# Altium PCB power_supply_pcb.PcbDoc
Units mm, origin at the board's own origin, x right, y up, seen from the top; angles counter-clockwise.
Board outline 52 x 90 mm, 2 copper layers (Top Layer, Bottom Layer); 8 components, 6 nets, 32 pads, 0 vias.
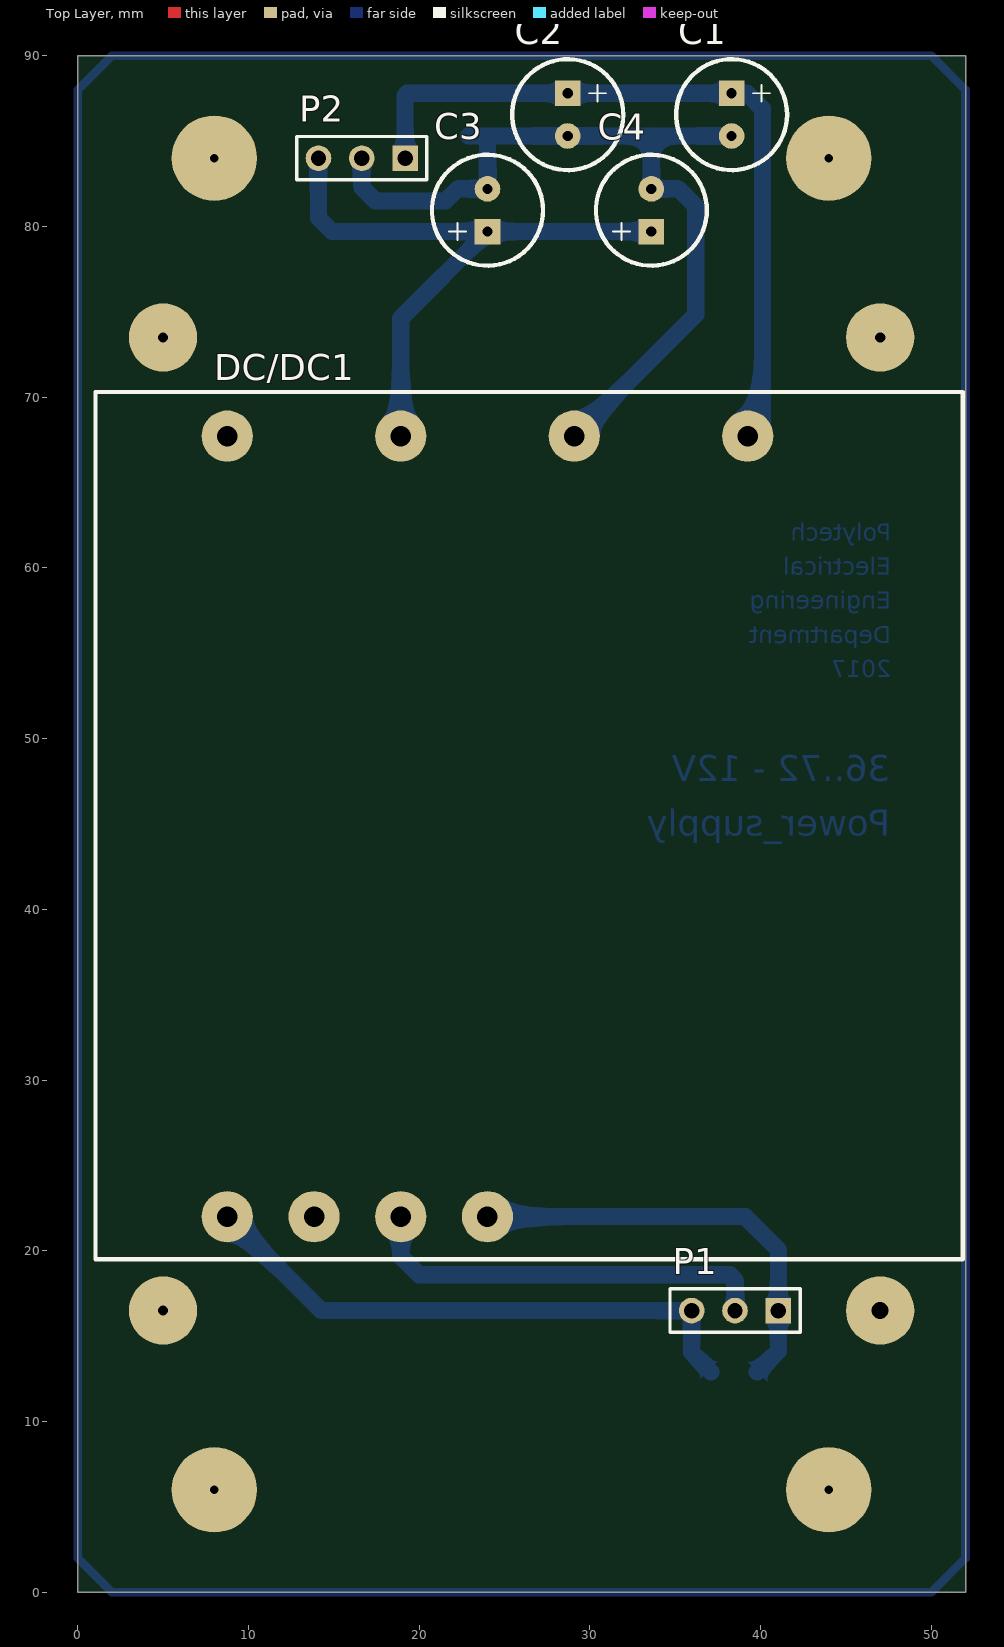
[diagram p0: Top Layer view]
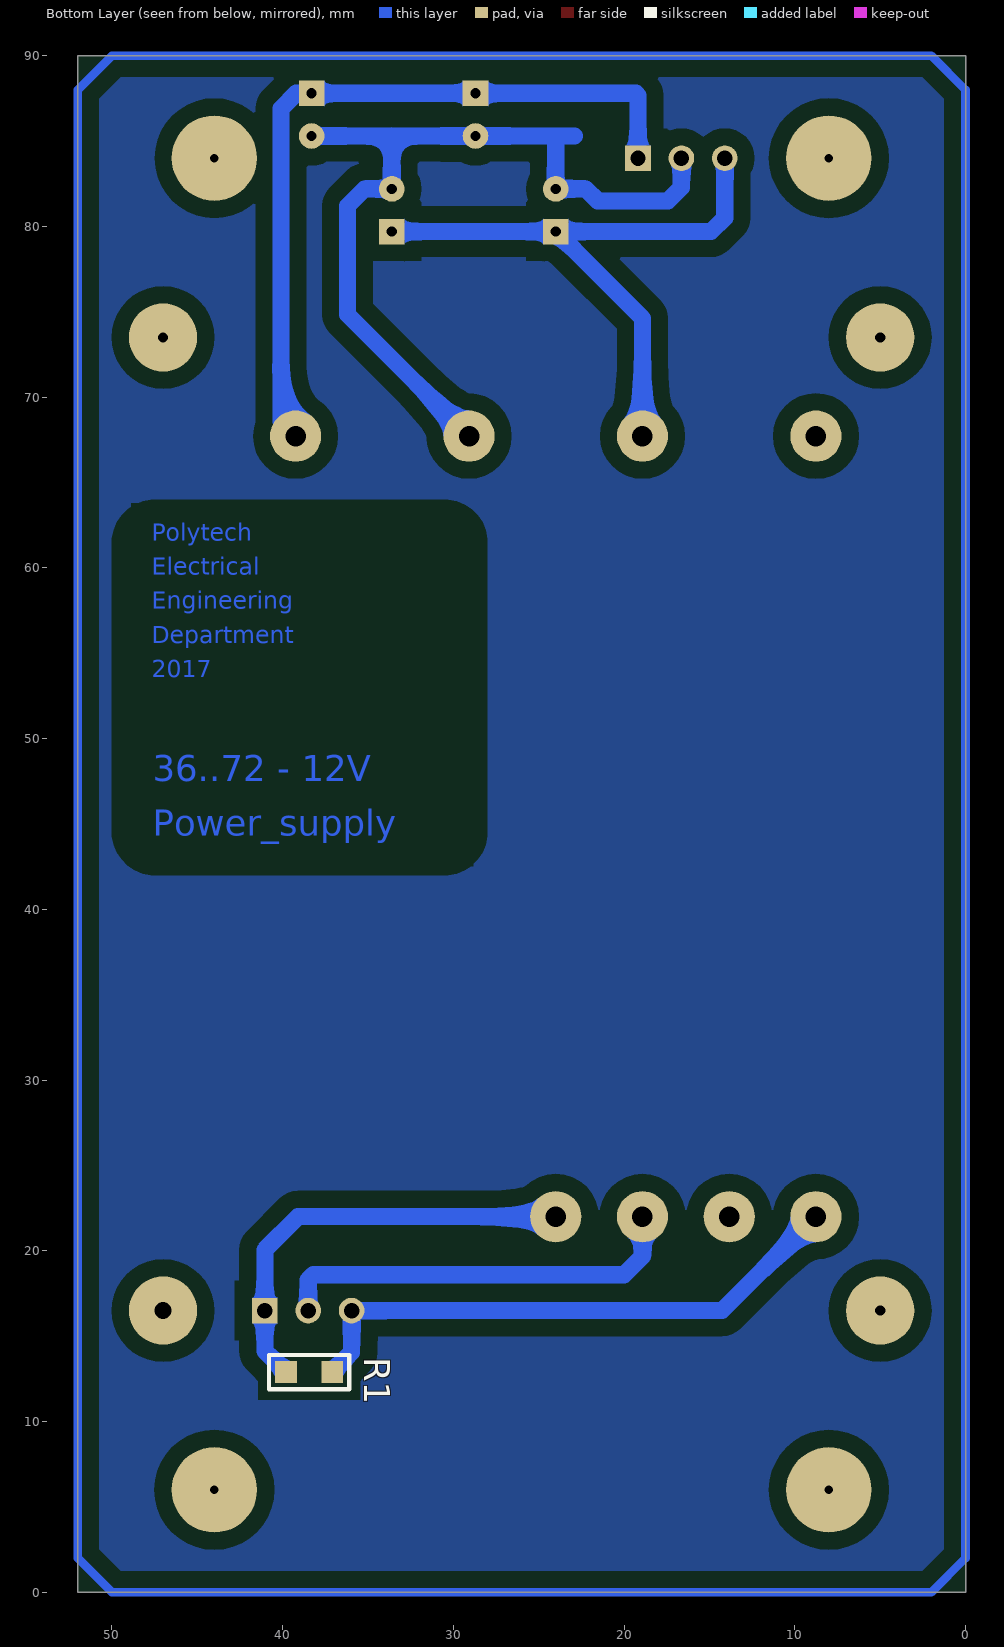
[diagram p1: Bottom Layer view, seen from below]
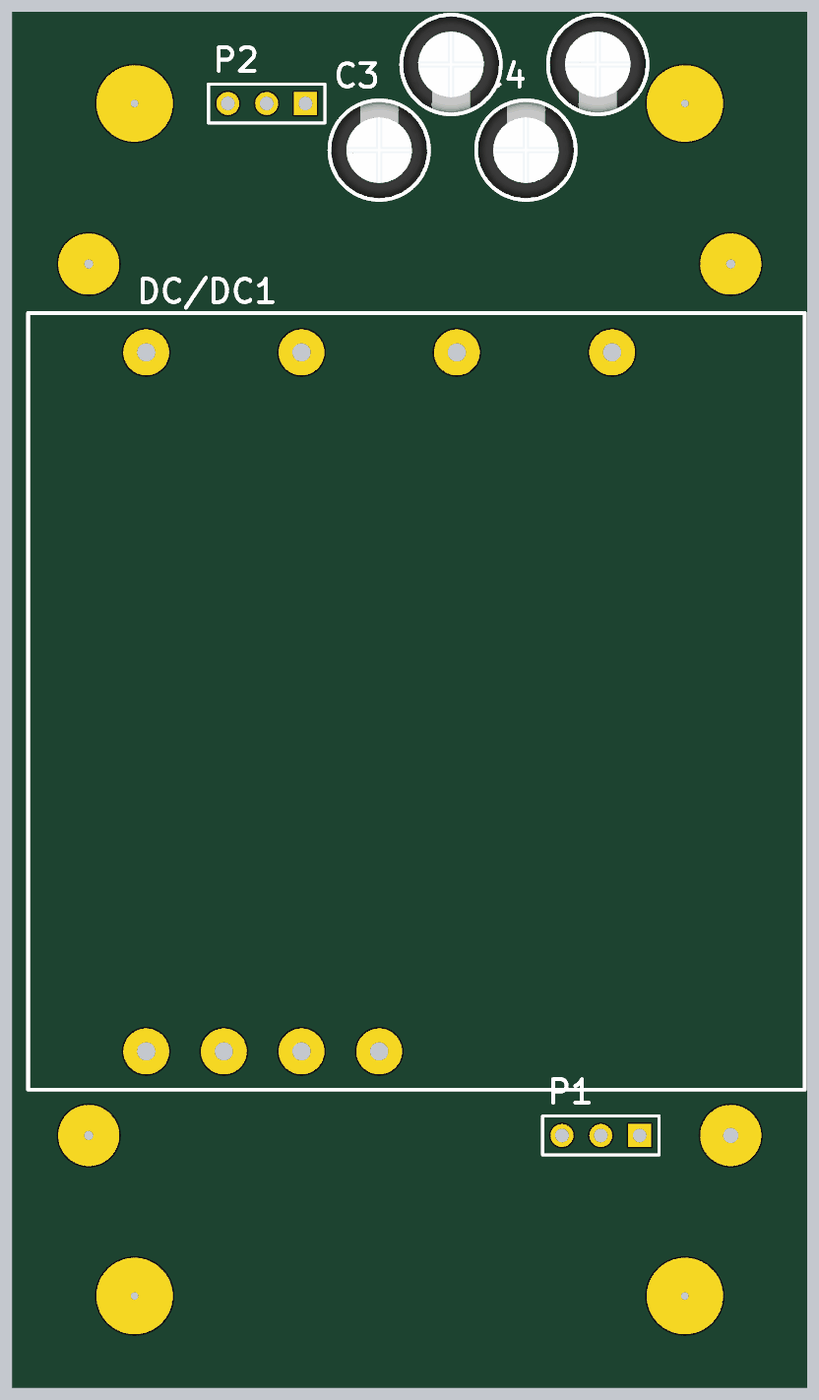
[diagram p2: 3D render of the assembled board from above, using the file's embedded part models]

## Layer stack, top to bottom
Top Solder: solder mask 0.0102, Solder Resist, Dk 3.5
Top Layer: signal copper 0.0356
Dielectric 1: dielectric 0.32, FR-4, Dk 4.8
Bottom Layer: signal copper 0.0356
Bottom Solder: solder mask 0.0102, Solder Resist, Dk 3.5

## Board outline
0,0 0,90 52,90 52,0

## Design rules (kind name [scope] priority, off if disabled: settings)
Clearance Poly_Clearence [All vs InPoly] p1: gap=1
Clearance Clearance_1 [All] p2: gap=0.254
PolygonConnect [All] p1: connectstyle=Relief reliefconductorwidth=0.254 reliefentries=4 polygonreliefangle="90 Angle" airgapwidth=0.254
RoutingVias [All] p1: holewidth=0.711 width=1.27 viastyle="Through Hole" minholewidth=0.711 minwidth=1.27 maxholewidth=0.711 maxwidth=1.27
SolderMaskExpansion [All] p1: expansion=0.102
Width [All] p1: maxlimit=2 minlimit=0.254 preferedwidth=0.5
30 further rules are at their usual default settings.

## Components (designator, comment, footprint, x,y, rotation, side; value= is the part's Value field where it differs from the comment)
C1 "220uF 25V" "Cond 6mm 25V" 38.3,87.8 r270 top
C2 "47uF 25V" "Cond 6mm 25V" 28.7,87.8 r270 top
C3 "220uF 25V" "Cond 6mm 25V" 24,79.7 r90 top
C4 "47uF 25V" "Cond 6mm 25V" 33.6,79.7 r90 top
DC/DC1 "DKA30C-12" MW_DKA30C-12 39.24,22 r0 top
P1 "Header 3" HDR1X3 41.04,16.5 r180 top
P2 "Header 3" HDR1X3 19.18,84 r180 top
R1 "10K" R0805 39.8,12.9 r180 bottom

## Footprints (in the part's own frame and the unit in brackets; to place one, negate y for a bottom-side part, rotate by r counter-clockwise, add the part's x,y. Pads: shape width x height; smd on the part's side, far side on the other; paste and mask are expansions set on the pad)
"Cond 6mm 25V" [mm]
  rect 1.5x1.5 hole 0.6: 1(0,0)
  round 1.5 hole 0.6: 2(2.5,0)
  silkscreen extent -2,-3.25 4.5,3.25, body extent -1.91,-3.15 4.4,3.15, height 12
HDR1X3 [mm] "Connector; Header; 3 Position"
  rect 1.5x1.5 hole 0.9: 1(0,0)
  round 1.5 hole 0.9: 2(2.54,0) 3(5.08,0)
  silkscreen extent -1.27,-1.27 6.35,1.27
MW_DKA30C-12 [mm]
  round 3 hole 1.2: 1(-30.48,0) 2(-25.4,0) 3(-20.32,0) 4(-15.24,0) 5(0,45.72) 6(-10.16,45.72) 7(-20.32,45.72) 8(-30.48,45.72)
  silkscreen extent -38.2,-2.5 12.6,48.3, body extent -38,-2.2 12.4,48.1, height 21
R0805 [mm]
  rect 1.27x1.27 smd: 1(0,0) 2(2.7,0)
  silkscreen extent -1,-1 3.7,1, body extent 0.35,-0.62 2.35,0.63, height 0.61

## Part data
C1 C2 C3 C4: library part Cond_polar
DC/DC1: library part MW_DKA30C-12
P1 P2: "Header, 3-Pin"
R1: library part Resistor

## Free pads (board coordinates)
  round 4 hole 0.6: 1(5,16.5) 2(5,73.5) 3(47,73.5)
  round 4 hole 1: 4(47,16.5)
  round 5 hole 0.5: 5(8,84) 6(44,84) 7(44,6) 8(8,6)

## Nets (pads, with @x,y where several pads share a name; then routed paths per layer and width w, separated by ;. In a path a pad name is that pad's centre, name@x,y a point inside that pad or via, vN(x,y) a via of type N, cw(c..) or ccw(c..) an arc to the next point about the centre after c; other vN are vias at no path point)
NetC1_1: C1.1 C2.1 DC/DC1.5 P2.1 | length 44.6
  Bottom Layer w1: P2.1 19.18,87.68 19.3,87.8 C2.1 C1.1 39.2,87.8 40.1,86.9 40.1,68.58 DC/DC1.5
NetC1_2: C1.2 C2.2 C3.2 C4.2 DC/DC1.6 P2.2 | length 50.8
  Bottom Layer w1: P2.2 16.64,82.29 17.43,81.5 21.542,81.5 22.242,82.2 C3.2 24,85.2 23.9,85.3 ; 22.9,85.3 23.9,85.3 ; DC/DC1.6 36.2,74.84 36.2,81.2 35.2,82.2 C4.2 33.6,85.3 ; C1.2 33.6,85.3 ; 23.9,85.3 C2.2 33.6,85.3
NetC3_1: C3.1 C4.1 DC/DC1.7 P2.3 | length 37.4
  Bottom Layer w1: P2.3 14.1,80.5 14.9,79.7 C3.1 ; DC/DC1.7 18.92,74.62 C3.1 ; C4.1 C3.1
NetDC/DC1_1: DC/DC1.1 P1.3 R1.2 | length 33.6
  Bottom Layer w1: DC/DC1.1 14.26,16.5 P1.3 35.96,14.04 R1.2
NetDC/DC1_3: DC/DC1.3 P1.2 | length 24.3
  Bottom Layer w1: DC/DC1.3 18.92,19.68 20,18.6 38.2,18.6 38.5,18.3 P1.2
NetDC/DC1_4: DC/DC1.4 P1.1 R1.1 | length 25.5
  Bottom Layer w1: DC/DC1.4 39.1,22 41.04,20.06 P1.1 41.04,14.14 R1.1
pads on no net: DC/DC1.2 DC/DC1.8
copper on no net: | length 279.3
  Bottom Layer w0.5: 0,2 2,0 50,0 52,2 52,88 50,90 2,90 0,88 0,2

## Polygon pours and split planes (outlines as drawn)
no net on Bottom Layer "Bottom Layer-No Net" (solid, pour order 0): 0,88 2,90 50,90 52,88 52,2 50,0 2,0 0,2

## Other copper
Bottom Layer:
  pour cut-out: 30.54,64 ccw(c30.54,61.46) 28,61.46 28,44.54 ccw(c30.54,44.54) 30.54,42 47.46,42 ccw(c47.46,44.54) 50,44.54 50,61.46 ccw(c47.46,61.46) 47.46,64
  text "Polytech" at 47.654,61.6 h1
  text "Electrical" at 47.654,59.6 h1
  text "Engineering" at 47.654,57.6 h1
  text "Department" at 47.654,55.6 h1
  text "2017" at 47.654,53.6 h1
  text "36..72 - 12V" at 47.6,47.5 h1.52
  text "Power_supply" at 47.6,44.3 h1.52